# Altium PCB PCB.PcbDoc
Units mil, origin at the board's own origin, x right, y up, seen from the top; angles counter-clockwise.
Board outline 1830.01 x 1935 mil, 2 copper layers (Top Layer, Bottom Layer); 22 components, 20 nets, 93 pads, 32 vias.
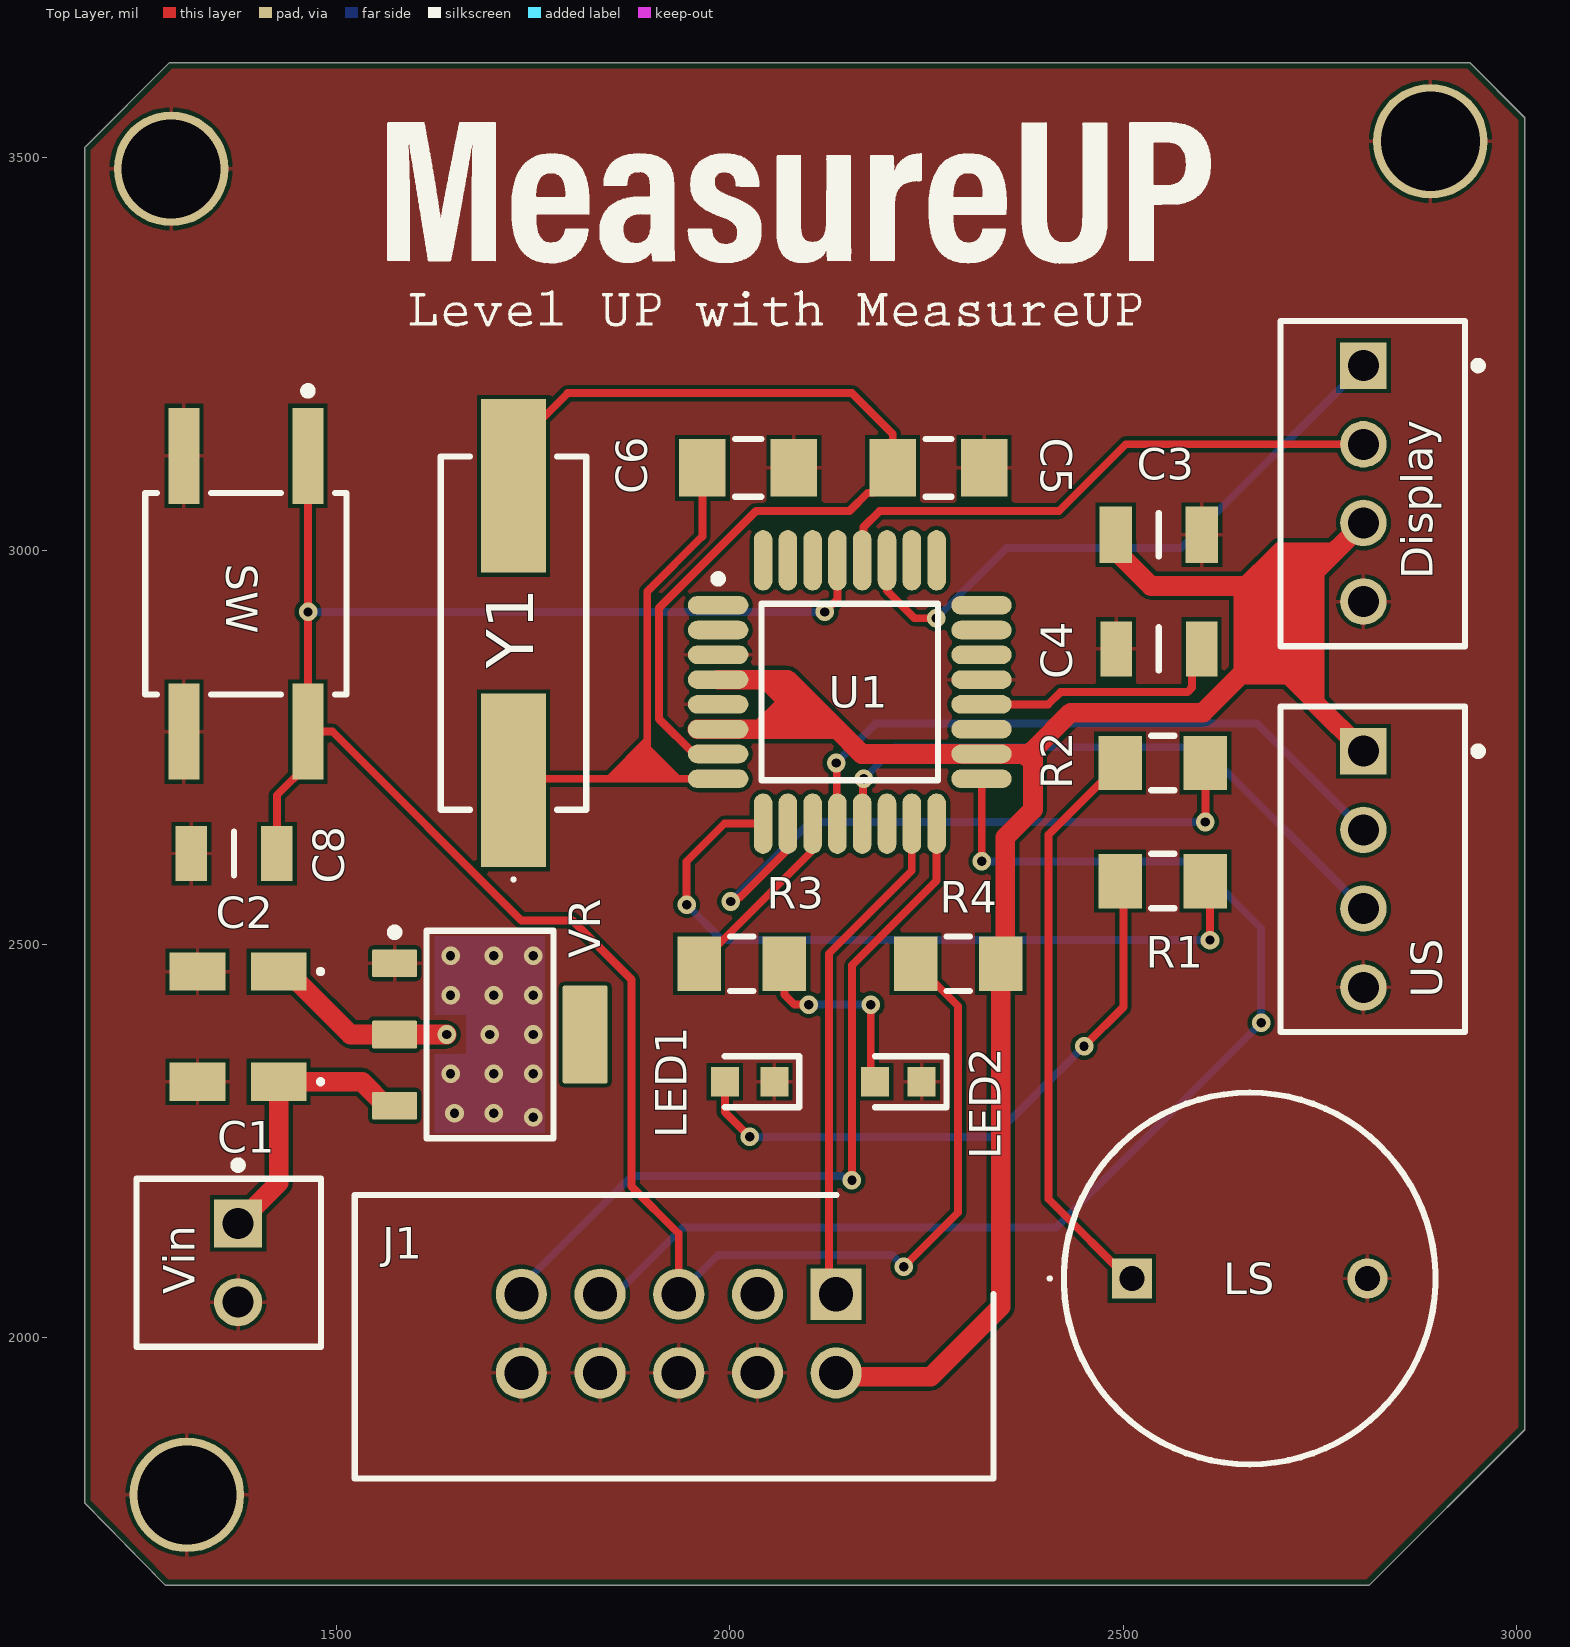
[diagram p0: Top Layer view]
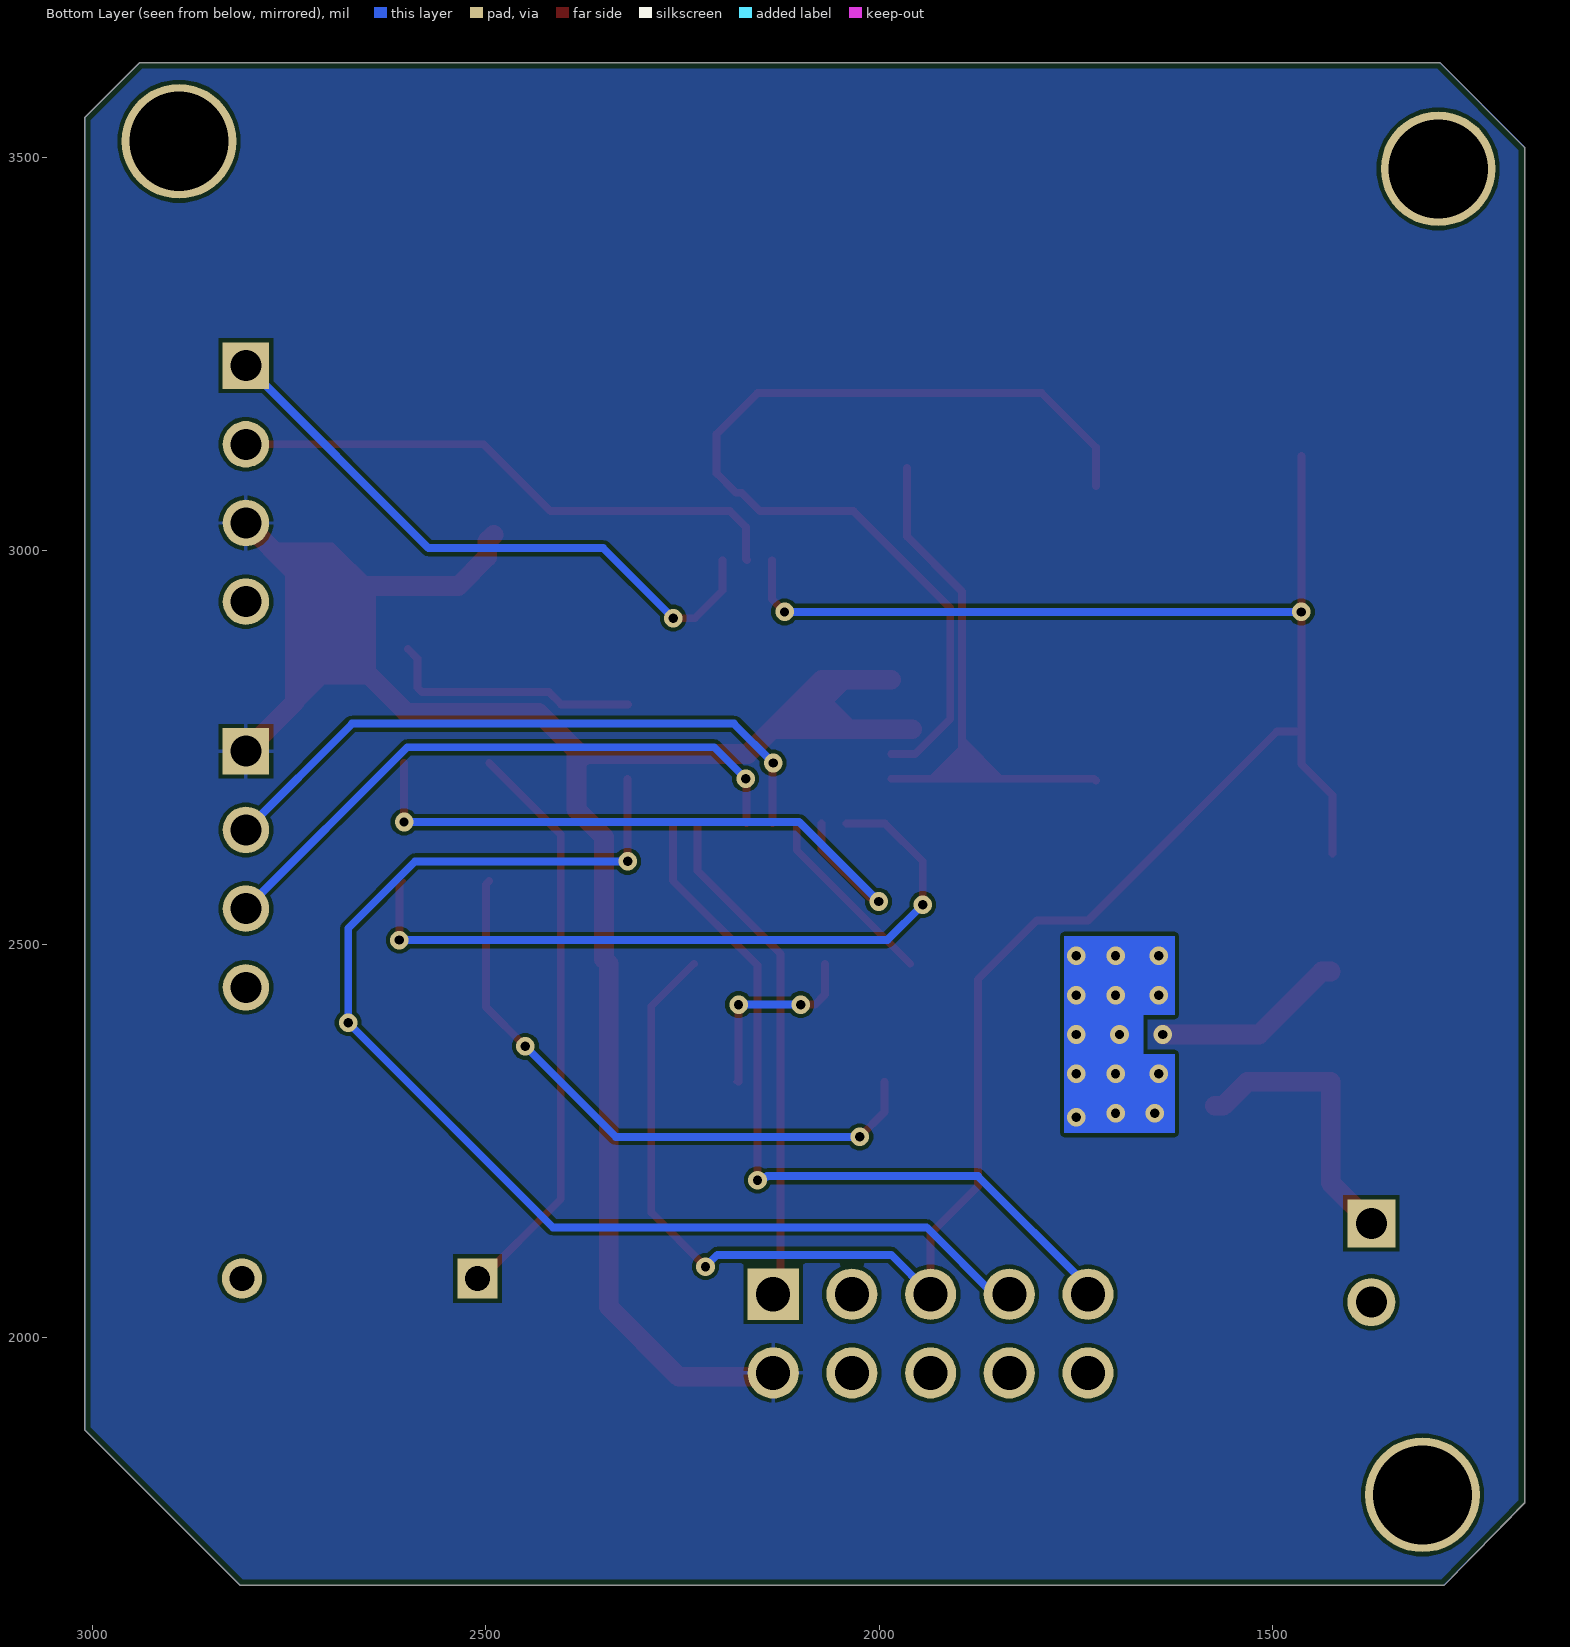
[diagram p1: Bottom Layer view, seen from below]
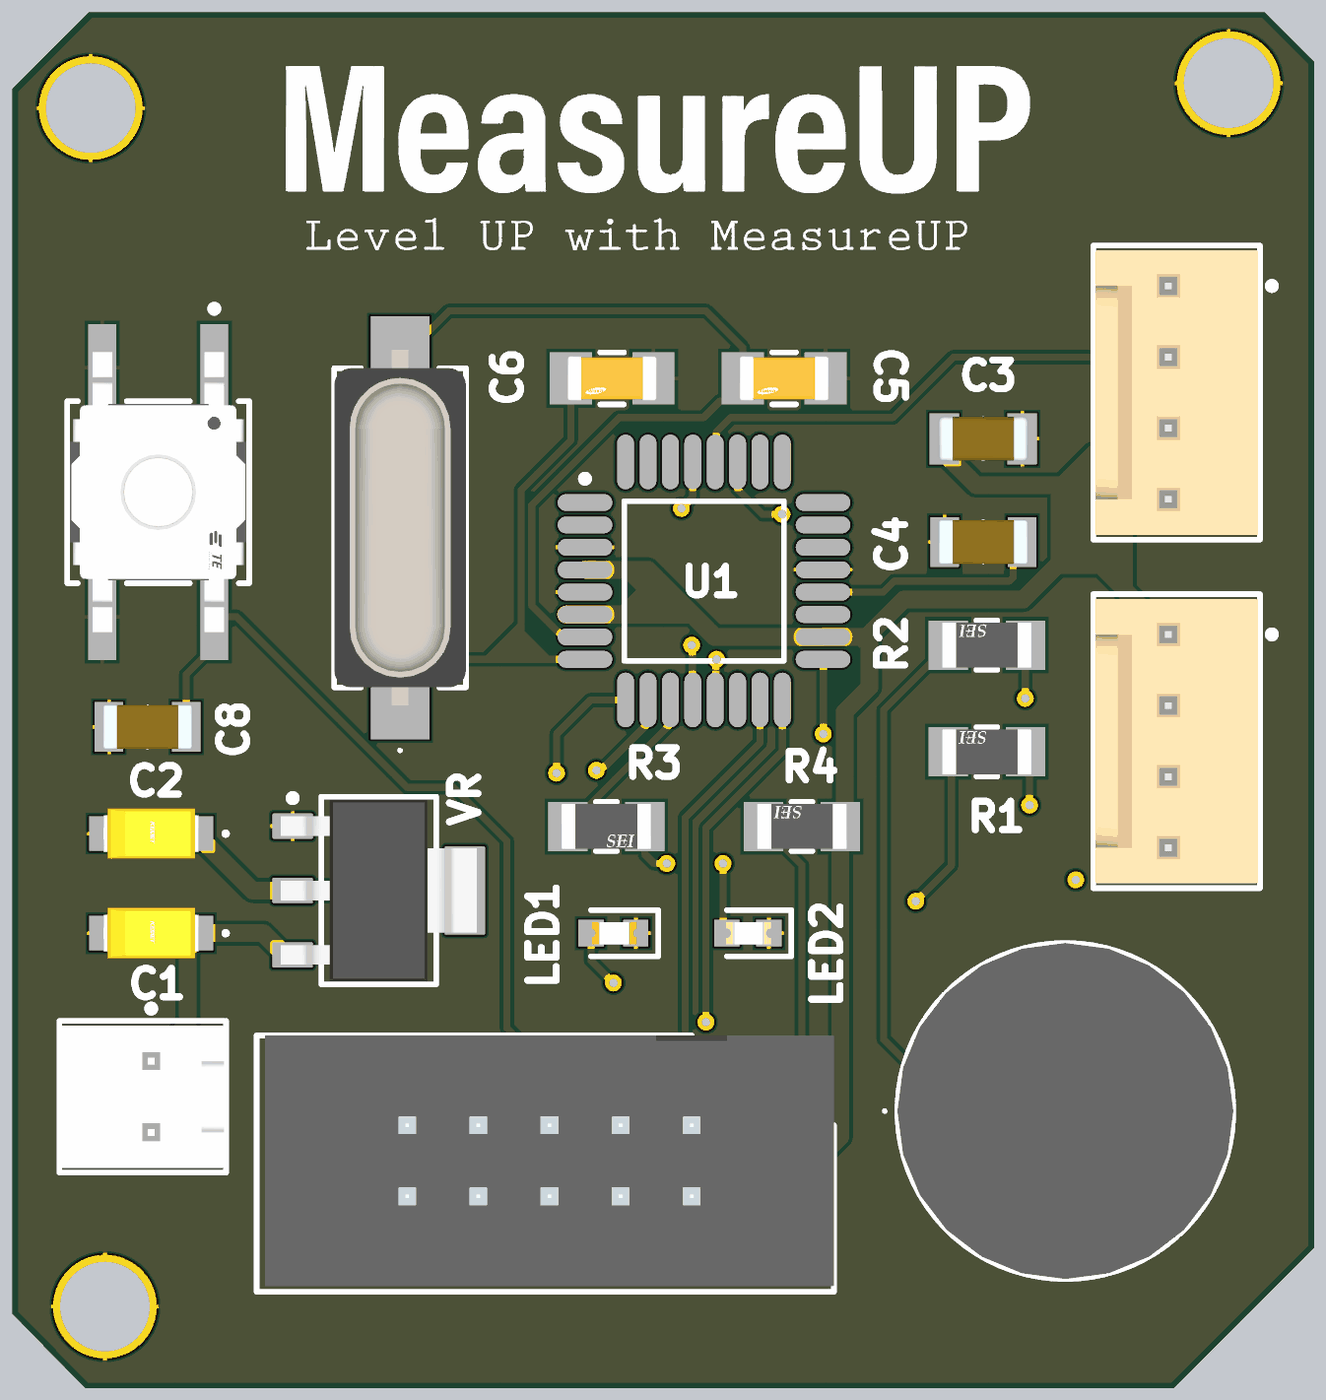
[diagram p2: 3D render of the assembled board from above, using the file's embedded part models]

## Layer stack, top to bottom
Top Solder: solder mask 0.4, Solder Resist, Dk 3.5
Top Layer: signal copper 1.4
Dielectric 1: dielectric 12.6, FR-4, Dk 4.8
Bottom Layer: signal copper 1.4
Bottom Solder: solder mask 0.4, Solder Resist, Dk 3.5

## Board outline
1282.65,1685 1179.99,1790 1179.99,3512.08 1181.45,3513.55 1287.91,3620 2940,3620 3010,3550 3010,1882.91 2812.09,1685

## Design rules (kind name [scope] priority, off if disabled: settings)
BoardOutlineClearance [All] p1: gap=7.87 ignorepadtopadclearanceinfootprint=FALSE
Clearance [All] p1: gap=5 ignorepadtopadclearanceinfootprint=FALSE except(9.84: Arc-Hole Track-Hole SMDPad-Hole THPad-Hole Via-Hole Fill-Hole Poly-Hole Region-Hole Text-Hole)
ComponentClearance [All] p1: gap=5 collisioncheckmode=3 verticalgap=5 showdistances=TRUE
DiffPairsRouting [All] p1: maxlimit=10 minlimit=5 mostfreqgap=5 toplayer_minwidth=5 toplayer_maxwidth=1000 toplayer_prefwidth=5 bottomlayer_minwidth=5 bottomlayer_maxwidth=1000 bottomlayer_prefwidth=5 maxuncoupledlength=500
Height [All] p1: minheight=0 maxheight=71497.94 prefheight=500
HoleSize [All] p1: absolutevalues=TRUE maxlimit=248.03 minlimit=11.81 maxpercent=80.000 minpercent=20.000
HoleToHoleClearance [All] p1: gap=9.84 allowstackedmicrovias=FALSE
MinimumAnnularRing [All] p1: minimumring=3
MinimumSolderMaskSliver [All] p1: minsoldermaskwidth=0
PlaneClearance [All] p1: clearance=5
PlaneConnect PlaneConnectPowerPads [InPadClass('PowerPads')] p1: planeconnectstyle=Direct reliefexpansion=20 reliefentries=4 reliefconductorwidth=10 reliefairgap=10
PlaneConnect [All] p2: pad.planeconnectstyle=Relief pad.reliefexpansion=11.81 pad.reliefentries=4 pad.reliefconductorwidth=5 pad.reliefairgap=5 via.planeconnectstyle=Direct via.reliefexpansion=11.81 via.reliefentries=4 via.reliefconductorwidth=5 via.reliefairgap=5
PolygonConnect PolygonConnectPowerPads [All vs (InPadClass('PowerPads'))] p1: connectstyle=Direct reliefconductorwidth=10 reliefentries=4 polygonreliefangle="90 Angle" airgapwidth=10
PolygonConnect [All] p2: thpad.connectstyle=Relief thpad.reliefconductorwidth=5 thpad.reliefentries=4 thpad.polygonreliefangle="90 Angle" thpad.airgapwidth=5 smdpad.connectstyle=Relief smdpad.reliefconductorwidth=5 smdpad.reliefentries=4 smdpad.polygonreliefangle="90 Angle" smdpad.airgapwidth=5 via.connectstyle=Direct via.reliefconductorwidth=5 via.reliefentries=4 via.polygonreliefangle="90 Angle" via.airgapwidth=5
RoutingVias [All] p1: holewidth=11.81 width=23.62 viastyle="Through Hole" minholewidth=11.81 minwidth=23.62 maxholewidth=23.62 maxwidth=259.84
SilkToSilkClearance [All] p1: silktosilkclearance=0
SilkToSolderMaskClearance [IsPad] p1: minsilkscreentomaskgap=5 clearancetoexposedcopper=TRUE
SolderMaskExpansion [All] p1: expansion=2.95 istentingtop=FALSE
Width [All] p1: maxlimit=1000 minlimit=5 preferedwidth=5 minimp=50.000000 maximp=50.000000 favimp=50.000000
20 further rules are at their usual default settings.

## Components (designator, comment, footprint, x,y, rotation, side; value= is the part's Value field where it differs from the comment)
C1 "T491A106K016AT" T491A 1375,2325 r180 top
C2 "T491A106K016AT" T491A 1375,2465 r180 top
C3 "CL31A106MAHNNNE" CAPC3216X180N 2545,3020 r180 top
C4 "CL31B104KBCNNNC" CAPC3216X100N 2545,2875 r0 top
C5 "CL31C220JBCNNNC" FP-CL31-IPC_A 2265,3105 r180 top
C6 "CL31C220JBCNNNC" FP-CL31-IPC_A 2023.12,3105 r180 top
C8 "CL31B104KBCNNNC" CAPC3216X100N 1370,2615 r0 top
Display "61900411121" 61900411121 2816.81,3085 r90 top
J1 "T821110A1S100CEU" SHDR10W64P254X254_2X5_2032X895X915P 2135,2055 r180 top
LED1 "LTST-C191KRKT" LEDC1608X55N 2025,2325 r180 top
LED2 "LTST-C190GKT" LEDC1608X90N 2214.06,2325 r180 top
LS "CMI-1295-0585T" CMI12950585T 2510.79,2075 r90 top
R1 "RMCF1206FT10K0" FP-RMCF1206-IPC_B 2550,2580 r180 top
R2 "RMCF1206FT10K0" FP-RMCF1206-IPC_B 2550,2730 r180 top
R3 "RMCF1206FT10K0" FP-RMCF1206-IPC_B 2015,2475 r0 top
R4 "RMCF1206FT10K0" FP-RMCF1206-IPC_B 2290,2475 r180 top
SW "1571634-2" FP-1571634-2-MFG 1385,2945 r270 top
U1 "ATmega328P-AU" 32A_M 2152.32,2820.24 r0 top
US "61900411121" 61900411121 2816.81,2595 r90 top
Vin "61900211121" FP-61900211121-MFG 1363.19,2095 r270 top
VR "LM1117MPX-5.0" DCY0004A_L 1695,2385 r0 top
Y1 "ABLS-16.000MHz-16-A-4-H-T" ABLS 1725,2895 r90 top

## Footprints (in the part's own frame and the unit in brackets; to place one, negate y for a bottom-side part, rotate by r counter-clockwise, add the part's x,y. Pads: shape width x height; smd on the part's side, far side on the other; paste and mask are expansions set on the pad)
32A_M [mm] "Thin QFP, 32-Leads, Body 7x7mm, Pitch 0.8mm, IPC Low Density"
  oval 1.95x0.6 smd: 1(-4.25,2.8) 2(-4.25,2) 3(-4.25,1.2) 4(-4.25,0.4) 5(-4.25,-0.4) 6(-4.25,-1.2) 7(-4.25,-2) 8(-4.25,-2.8) 17(4.25,-2.8) 18(4.25,-2) 19(4.25,-1.2) 20(4.25,-0.4) 21(4.25,0.4) 22(4.25,1.2) 23(4.25,2) 24(4.25,2.8)
  oval 0.6x1.95 smd: 9(-2.8,-4.25) 10(-2,-4.25) 11(-1.2,-4.25) 12(-0.4,-4.25) 13(0.4,-4.25) 14(1.2,-4.25) 15(2,-4.25) 16(2.8,-4.25) 25(2.8,4.25) 26(2,4.25) 27(1.2,4.25) 28(0.4,4.25) 29(-0.4,4.25) 30(-1.2,4.25) 31(-2,4.25) 32(-2.8,4.25)
  silkscreen extent -4.37,-2.85 2.85,3.77, body extent -3.5,-3.5 3.5,3.5, height 1.2
61900411121 [mm] "2.54mm Male Locking Header, 4p"
  rect 1.5x1.5 hole 1: 1(3.81,0.3)
  round 1.5 hole 1: 2(1.27,0.3) 3(-1.27,0.3) 4(-3.81,0.3)
  silkscreen extent -5.25,-3.52 5.25,2.97, body extent -5.08,-2.9 5.08,2.9, height 11.53
ABLS [mm]
  rect 5.6x2.1 smd: 1(-4.75,0) 2(4.75,0)
  silkscreen extent -8,-2.35 5.7,2.35, body extent -6.35,-2.35 6.35,2.35, height 4.2
CAPC3216X100N [mm]
  rect 1.02x1.78 smd: 1(-1.38,0) 2(1.38,0)
  silkscreen extent 0,-0.7 0,0.7, body extent -1.6,-0.8 1.6,0.8, height 1
CAPC3216X180N [mm]
  rect 1.05x1.82 smd: 1(-1.39,0) 2(1.39,0)
  silkscreen extent 0,-0.7 0,0.7, body extent -1.6,-0.8 1.6,0.8, height 1.8
CMI12950585T [mm]
  rect 1.3x1.3 hole 0.8: 1(0,0)
  round 1.3 hole 0.8: 2(0,-7.6)
  silkscreen extent -6,-9.8 6,2.7, body extent -6,-9.79 6,2.19, height 9.8
DCY0004A_L [mm] "SOT223, 4-Leads, Body 6.7x3.7mm, Pitch 2.3mm, IPC High Density"
  rrect11% 1.45x0.9 smd: 1(-3.075,2.3) 2(-3.075,0) 3(-3.075,-2.3)
  rrect7% 1.45x3.15 smd: 4(3.075,0)
  silkscreen extent -3.2,-3.35 2.05,3.42, body extent -3.5,-3.25 3.5,3.25, height 1.62
FP-1571634-2-MFG [mm]
  rect 3.1x1 smd paste+0 mask+0: 1(-4.45,2) 2(4.45,2) 3(-4.45,-2) 4(4.45,-2)
  silkscreen extent -6.67,-3.25 3.25,3.25, body extent -6.1,-3.35 6.1,3.35, height 0.25
FP-61900211121-MFG [mm]
  rect 1.55x1.55 hole 1 paste-1000 mask+0: 1(-1.27,0.3)
  round 1.55 hole 1 paste-1000 mask+0: 2(1.27,0.3)
  silkscreen extent -3.27,-2.97 2.71,2.98, body extent -2.81,-3.08 2.81,3.08, height 0.25
FP-CL31-IPC_A [mil]
  rect 59.27x73.16 smd paste+0 mask+0: 1(-58.12,0) 2(58.12,0)
  silkscreen extent -17,-37 17,37, body extent -107,-56 107,56, height 10
FP-RMCF1206-IPC_B [mil]
  rect 55.27x69.22 smd paste+0 mask+0: 1(-54.16,0) 2(54.16,0)
  silkscreen extent -15,-35 15,35, body extent -92,-44 92,44, height 10
LEDC1608X55N [mm]
  rect 0.9x0.95 smd: 1(-0.8,0) 2(0.8,0)
  silkscreen extent -1.6,-0.82 0.8,0.82, body extent -0.83,-0.4 0.77,0.4, height 0.55
LEDC1608X90N [mm]
  rect 0.9x0.95 smd: 1(-0.75,0) 2(0.75,0)
  silkscreen extent -1.55,-0.82 0.75,0.82, body extent -0.82,-0.4 0.78,0.4, height 0.8
SHDR10W64P254X254_2X5_2032X895X915P [mm]
  rect 1.65x1.65 hole 1.1: 1(0,0)
  round 1.65 hole 1.1: 2(0,2.54) 3(2.54,0) 4(2.54,2.54) 5(5.08,0) 6(5.08,2.54) 7(7.62,0) 8(7.62,2.54) 9(10.16,0) 10(10.16,2.54)
  silkscreen extent -5.08,-3.21 15.54,5.95, body extent -5.08,-3.2 15.24,5.74, height 9.15
T491A [mm]
  rect 1.8x1.23 smd: 1(-1.31,0) 2(1.31,0)
  silkscreen extent -2.71,-0.05 -2.61,0.05, body extent -1.7,-0.9 1.7,0.9, height 1.81

## Part data
C1 C2: "Capacitor Polarised", Manufacturer_Name=KEMET, Mouser Part Number=80-T491A106K016, Arrow Part Number=T491A106K016AT, Arrow Price/Stock=https://www.arrow.com/en/products/t491a106k016at/kemet-corporation?region=nac, Datasheet Link=https://content.kemet.com/datasheets/KEM_T2005_T491.pdf, Height=1.8mm, Manufacturer_Part_Number=T491A106K016AT, Mouser Price/Stock=https://www.mouser.co.uk/ProductDetail/KEMET/T491A106K016AT?qs=hg06hKRDeG1uMktjT%252BG2VQ%3D%3D
C3: "Capacitor", Manufacturer_Name=SAMSUNG, Mouser Part Number=187-CL31A106MAHNNNE, Arrow Part Number=CL31A106MAHNNNE, Arrow Price/Stock=https://www.arrow.com/en/products/cl31a106mahnnne/samsung-electro-mechanics?region=nac, Datasheet Link=https://www.arrow.com/en/products/cl31a106mahnnne/samsung-electro-mechanics, Height=1.8mm, Manufacturer_Part_Number=CL31A106MAHNNNE, Mouser Price/Stock=https://www.mouser.co.uk/ProductDetail/Samsung-Electro-Mechanics/CL31A106MAHNNNE?qs=9y2YoPkPyvYkOWbcUKSn%252BQ%3D%3D
C4 C8: "Capacitor", Manufacturer_Name=SAMSUNG, Mouser Part Number=187-CL31B104KBCNNNC, Arrow Part Number=CL31B104KBCNNNC, Arrow Price/Stock=https://www.arrow.com/en/products/cl31b104kbcnnnc/samsung-electro-mechanics?region=nac, Datasheet Link=https://datasheet.datasheetarchive.com/originals/distributors/Datasheets_SAMA/0fdb6a11e020a7299f4d0713dd2bd7ee.pdf, Height=1mm, Manufacturer_Part_Number=CL31B104KBCNNNC, Mouser Price/Stock=https://www.mouser.co.uk/ProductDetail/Samsung-Electro-Mechanics/CL31B104KBCNNNC?qs=349EhDEZ59oHABbyGq1iKA%3D%3D
C5 C6: library part CMP-13271-001055-1, "Cap Ceramic 22pF 50V C0G ±5% SMD 1206 +125°C Embossed T/R", Capacitance=22pF, Case Code (Imperial)=1206, Case Code (Metric)=3216, Dielectric=C0G, Max Operating Temperature=125°C, Min Operating Temperature=-55°C, Package Quantity=1, Temperature Coefficient=300ppm/°C, Tolerance=5%, Voltage=50V, Case/Package=1206, Depth=1.6mm, Height=0.85mm, Lead Free="Lead Free", Length=3.2mm, Material=Ceramic, Mount="Surface Mount", Packaging="Tape and Reel", Radiation Hardening=No, Thickness=0.039inch, Voltage Rating=50V, Voltage Rating (DC)=50V, Width=0.063inch
Display US: library part CMP-1502-00586-1, "Male Locking Header WR-WTB, THT, Vertical, pitch 2.54 mm, 1 x 4 position", Contact Resistance=20mOhm, Manufacturer="Wurth Elektronik", Operating Temperature=-40to105degC, Working Voltage=250VAC, Datasheet URL=https://katalog.we-online.de/em/datasheet/6190xx11121.pdf, Gender=Male, Manufacturer URL=http://www.we-online.de, Mounting Technology=THT, Orientation=Vertical, Package Reference=61900411121, Packaging=Bag, Part Number=61900411121, Pitch=2.54mm, Position=1x4, Publisher=WurthElektronik
J1: "Connector", Manufacturer_Name=Amphenol, Mouser Part Number=N/A, Arrow Part Number=T821110A1S100CEU, Arrow Price/Stock=https://www.arrow.com/en/products/t821110a1s100ceu/amphenol-fci?region=europe, Datasheet Link=https://docs.rs-online.com/e09c/0900766b81359cba.pdf, Height=9.15mm, Manufacturer_Part_Number=T821110A1S100CEU, Mouser Price/Stock=https://www.mouser.co.uk/ProductDetail/Amphenol/T821110A1S100CEU?qs=3IN%252Br8p6BrNf%2FuKCWm44Bg%3D%3D
LED1: "LED", Manufacturer_Name=Lite-On, Mouser Part Number=859-LTST-C191KRKT, Arrow Part Number=LTST-C191KRKT, Arrow Price/Stock=https://www.arrow.com/en/products/ltst-c191krkt/lite-on-technology?region=nac, Datasheet Link=http://www.mouser.com/ds/2/239/S_110_LTST-C191KRKT-539838.pdf, Height=0.55mm, Manufacturer_Part_Number=LTST-C191KRKT, Mouser Price/Stock=https://www.mouser.co.uk/ProductDetail/Lite-On/LTST-C191KRKT?qs=BAIUz4Y8PJBLfOhzue0q%252BA%3D%3D
LED2: "LED", Manufacturer_Name=Lite-On, Mouser Part Number=859-LTST-C190GKT, Arrow Part Number=LTST-C190GKT, Arrow Price/Stock=https://www.arrow.com/en/products/ltst-c190gkt/lite-on-technology?region=nac, Datasheet Link=https://media.digikey.com/pdf/Data%20Sheets/Lite-On%20PDFs/LTST-C190GKT.pdf, Height=0.9mm, Manufacturer_Part_Number=LTST-C190GKT, Mouser Price/Stock=https://www.mouser.co.uk/ProductDetail/Lite-On/LTST-C190GKT?qs=drxkyCeiWgbQzclgbojDOg%3D%3D
LS: "Loudspeaker or Buzzer", Manufacturer_Name="CUI Devices", Mouser Part Number=490-CMI-1295-0585T, Arrow Part Number=CMI-1295-0585T, Arrow Price/Stock=https://www.arrow.com/en/products/cmi-1295-0585t/cui-devices?region=nac, Datasheet Link=https://www.cuidevices.com/product/resource/pdf/cmi-1295-0585t.pdf, Height=9.7mm, Manufacturer_Part_Number=CMI-1295-0585T, Mouser Price/Stock=https://www.mouser.co.uk/ProductDetail/CUI-Devices/CMI-1295-0585T?qs=P1JMDcb91o6b8IYPugSq6A%3D%3D
R1 R2 R3 R4: library part CMP-26527-000151-1, "10kΩ ±1% 0.25W 1206 Thick Film Chip Resistor AEC-Q200 compliant RMCF1206FT10K0", Case Code (Imperial)=1206, Case Code (Metric)=3216, Max Operating Temperature=155°C, Max Power Dissipation=250mW, Min Operating Temperature=-55°C, Resistance=10kR, Resistor Type="Thick Film", Temperature Coefficient=100ppm/°C, Tolerance=1%, Case/Package=1206, Construction=Rectangular, Contact Plating=Tin, Depth=1.6mm, Features="Automotive AEC-Q200", Height=0.028inch, Lead Free="Lead Free", Length=3.2mm, Military Standard=Not, Mount="Surface Mount", Number of Terminations=2, Packaging="Tape and Reel", Power Rating=250mW, Radiation Hardening=No, RoHS Compliant=Yes, Series=RMCF, Size Code=1206, Width=0.063inch
SW: library part CMP-03407-000008-1, "SWITCH TACTILE SPST-NO 0.05A 24V", Actuator Color=Natural, Case/Package=SMD/SMT, Contact Current Rating=50mA, Max Operating Temperature=85°C, Max Voltage Rating (DC)=12V, Min Operating Temperature=-40°C, Operating Force=160gf, Package Quantity=1000, Actuator Length=0.094inch, Actuator Material=Rubber, Actuator Type=Standard, Contact Material="Stainless Steel", Contact Plating=Silver, Current Rating=50mA, Depth=10mm, ELV=Compliant, Illumination Type=Illuminated, Lead Free="Lead Free", Length=6.2mm, Max Current Rating=50mA, Mechanical Life=5000000Cycles, Mount="Surface Mount", Orientation=Straight, Packaging="Tape and Reel", Radiation Hardening=No, RoHS Compliant=Yes, Switch Function=Off-Mom, Termination="Gull Wing", Throw Configuration=SPST, Type=Switch, Voltage Rating (DC)=12V
U1: library part CMP-0095-00269-2, "8-bit AVR Microcontroller, 32KB Flash, 1KB EEPROM, 2KB SRAM, 32-pin TQFP, Industrial Grade (-40°C to 85°C)", Code_JEDEC=MS-026-ABA, ComponentLink1Description="Manufacturer URL", ComponentLink1URL=http://www.atmel.com/, ComponentLink2Description="ATmega48A/48PA/88A/88PA/168A/168PA/328/328P Datasheet", ComponentLink2URL=http://www.atmel.com/dyn/resources/prod_documents/doc8271.pdf, ComponentLink3Description="ATmega48A/48PA/88A/88PA/168A/168PA/328/328P Summary", ComponentLink3URL=http://www.atmel.com/dyn/resources/prod_documents/8271S.pdf, DatasheetVersion="revD, May-2011", PackageDescription="32-Lead, 7x7x1.0 mm Body, 0.8mm Lead Pitch, Thin Profile Plastic Quad Flat Package (TQFP)", PackageReference=32A, PackageVersion="revC, Oct-2010", RevisionNote="DatasheetVersion & PackageVersion updated. URLs added."
Vin: library part CMP-1502-00584-2, "CONN HEADER VERT 2POS 2.54MM", Color=Beige, Current Rating=3A, Flammability Rating="UL94 V-0", Insulation Resistance=1GR, Max Operating Temperature=105°C, Min Operating Temperature=-40°C, Package Quantity=1000, Voltage Rating=250V, Connector Type=Header, Contact Finish - Mating=TIN, Contact Gender=Male, Contact Material="Copper Alloy", Contact Mating Length=0.295inch, Contact Plating=Tin, Contact Shape=Square, Contact Type="Male Pin", Fastening Type=Friction, Gender=Male, Height=14.2mm, Housing Material=Nylon, Insulation Color=Beige, Insulation Material=Nylon, Length=5.8mm, Mount="Through Hole", Number of Contacts=2, Number of Positions=2, Number of Rows=1, Packaging=Bulk, Pitch=2.54mm, RoHS Compliant=Yes, Series=WR-WTB, Termination="Through Hole", Width=5.12mm
VR: library part CMP-0062-01637-4, "800mA Low-Dropout Linear Regulator, 4-pin SOT-223", Manufacturer="Texas Instruments", PackageTopMarking=XYTT*N06A, PowerWise=N, Code_IPC=SOT223-4, Code_JEDEC=TO-261-AA, ComponentLink1Description="Datasheet URL", ComponentLink1URL=http://www.ti.com/general/docs/lit/getliterature.tsp?genericPartNumber=LM1117-N&fileType=pdf, CompType="LDO IC", High-Reliability=Y, PackageDescription="Molded SOT-223, 6.50 x 3.56 x 1.6mm Body, 4 Lead, 2.3mm Pitch", PackageReference=DCY0004A, PartNumber=LM1117MPX-5.0, PinCount=4, RoHS=N
Y1: "Crystal or Oscillator", Arrow Part Number=ABLS-16.000MHZ-16-A-4-H-T, Manufacturer_Name=ABRACON, Mouser Part Number=815-LS16000MHZ16A4HT, Arrow Price/Stock=https://www.arrow.com/en/products/abls-16.000mhz-16-a-4-h-t/abracon, Datasheet Link=https://abracon.com/Resonators/abls.pdf, Manufacturer_Part_Number=ABLS-16.000MHz-16-A-4-H-T, Mouser Price/Stock=https://www.mouser.co.uk/ProductDetail/ABRACON/ABLS-16.000MHZ-16-A-4-H-T?qs=vLWxofP3U2z6hhU1at4Vrw%3D%3D

## Free pads (board coordinates)
  round 145.67 hole 125.98: 7(1290,3485) 8(2890,3520) 10(1310,1800)

## Via types
v1: diameter 23.62, hole 11.81, Top Layer to Bottom Layer, 17 vias
v2: diameter 23.62, hole 11.81, Top Layer to Bottom Layer, tented both sides, 15 vias

## Nets (pads, with @x,y where several pads share a name; then routed paths per layer and width w, separated by ;. In a path a pad name is that pad's centre, name@x,y a point inside that pad or via, vN(x,y) a via of type N, cw(c..) or ccw(c..) an arc to the next point about the centre after c; other vN are vias at no path point)
9V: C1.1 Vin.1 VR.3 | length 361.4
  Top Layer w25: Vin.1 1426.57,2196.57 C1.1 1532.56,2325 1563.11,2294.45 VR.3
+5V: C2.1 C3.2 Display.3 J1.2 R4.1 U1.4 U1.6 U1.18 US.1 VR.2 | length 2882.1
  Top Layer w25: C2.1 1437.8,2465 1517.8,2385 v2(1640,2385) ; U1.6@1958.43,2772.99 U1.6 2136,2772.99 ; U1.4 2073.01,2835.98 2136,2772.99 ; J1.2@2150,1950 2255,1950 2344.16,2039.16 R4.1 2350,2480.84 2350,2635.84 2385,2670.84 2385,2741.5 2385,2746 2433,2794 2601,2794 2743,2936 ; 2377.85,2737.17 2372.5,2741.5 2167.5,2741.5 2136,2772.99 ; C3.2 2498.45,3011.83 2498.45,2991.55 2535,2955 2743,2955 ; US.1 2743,2807 2743,2936 ; Display.3 2743,2973 2743,2955 ; 2743,2936 2743,2955
D5: R1.1 U1.9 | length 933
  Top Layer w5: R1.1 R1.1@2610,2574.16
  Top Layer w10: v1(1945,2550) 1945,2605 1992.91,2652.91 U1.9 ; v1(2610,2505) R1.1@2610,2574.16
  Bottom Layer w10: v1(1945,2550) 1990,2505 v1(2610,2505)
D6: R2.1 U1.10 | length 852.7
  Top Layer w5: v1(2604,2655) v1@2604.16,2655.16
  Top Layer w10: v1(2001,2554) 2006.04,2554 2011.4,2559.36 2012.95,2559.36 2073.58,2620 U1.10 ; v1@2604.16,2655.16 R2.1
  Bottom Layer w10: v1(2001,2554) 2102,2655 v1(2604,2655)
D7: R3.1 U1.11 | length 237.7
  Top Layer w10: R3.1 2105.08,2619.24 U1.11
ECHO: U1.13 US.3 | length 794.4
  Top Layer w5: U1.13 U1.13@2169.03,2653.88 ; v1@2169.03,2709.03 v1(2170,2710)
  Top Layer w10: U1.13@2169.03,2653.88 v1@2169.03,2709.03
  Bottom Layer w10: v1(2170,2710) 2210,2750 2600,2750 US.3
GND: C1.2 C2.2 C3.1 C4.1 C5.1 C6.1 C8.1 Display.4 J1.4 J1.6 J1.8 J1.10 LED1.1 LED2.1 LS.2 pad.7 pad.8 pad.10 SW.3 SW.4 U1.3 U1.5 U1.21 US.4 Vin.2 VR.1
  other v2: 1750,2280 1650,2285 1700,2285 1645,2335 1700,2335 1750,2335 1695,2385 1750,2385 1645,2435 1700,2435 1750,2435 1645,2485 1700,2485 1750,2485
MISO: J1.9 U1.16 | length 987.5
  Top Layer w10: v1(2155,2200) 2155,2473 2262.56,2580.56 U1.16
  Bottom Layer w10: J1.9 1735,2065 1875,2205 2142.76,2205 2144.2,2203.56 2151.44,2203.56 v1(2155,2200)
MOSI: J1.1 U1.15 | length 656.6
  Top Layer w10: J1.1@2150,2050 2125.69,2074.31 2125.69,2487.69 2231.06,2593.06 U1.15
NetC4_2: C4.2 U1.20 | length 330.5
  Top Layer w10: U1.20 2404.49,2804.49 2420,2820 2581.28,2820 2587.14,2825.86 2587.14,2862.81 C4.2
NetC5_2: C5.2 U1.7 Y1.2 | length 1233.3
  Top Layer w10: Y1.2 1725,3131.16 1793.84,3200 2155,3200 2206.88,3148.12 2206.88,3098.06 2182.24,3073.42 2175.3,3073.42 2152.01,3050.13 2033.13,3050.13 1910,2927 1910,2786 1954.5,2741.5 U1.7
NetC6_2: C6.2 U1.8 Y1.1 | length 684.8
  Top Layer w10: Y1.1 1727.01,2710 1895,2710 ; C6.2 1965,3018 1895,2948 1895,2710 ; U1.8 1895,2710
NetLED1_2: LED1.2 R1.2 | length 788.1
  Top Layer w10: LED1.2 1993.5,2286.5 v1(2025,2255) ; v1(2450,2370) 2500,2420 2500,2575.84 R1.2
  Bottom Layer w10: v1(2025,2255) 2335,2255 v1(2450,2370)
NetLED2_2: LED2.2 R3.2 | length 256.8
  Top Layer w5: LED2.2@2179,2325 LED2.2@2183.5,2325
  Top Layer w10: R3.2 2069.18,2435.82 2082,2423 v1(2100,2423) ; LED2.2@2179,2325 v1(2179,2423)
  Bottom Layer w10: v1(2100,2423) v1(2179,2423)
NetLS_1: LS.1 R2.2 | length 741.4
  Top Layer w10: R2.2 2405,2639.16 2405,2175.79 LS.1@2510.79,2070
RESET: C8.2 J1.5 R4.2 SW.1 SW.2 U1.29 | length 2966.1
  Top Layer w10: C8.2 1424.33,2689.06 1463.74,2728.47 SW.2 ; SW.1 v1@1463.74,2922.26 ; v1(1464,2922) v1@1463.74,2922.26 ; J1.5 1935,2132 1875,2192 1875,2455 1800,2530 1735,2530 1495.2,2769.8 SW.2 ; v1(2120.57,2922) 2136.57,2938 U1.29 ; v1(2221,2090) 2290,2159 2290,2420.84 R4.2 ; SW.2 v1@1463.74,2922.26
  Bottom Layer w10: v1(1464,2922) v1(2120.57,2922) ; J1.5 1985,2105 2206,2105 v1(2221,2090)
SCK: J1.7 U1.17 | length 1585.3
  Top Layer w5: U1.17 U1.17@2320,2709.64
  Top Layer w10: v1(2320,2605) U1.17@2320,2709.64
  Bottom Layer w10: J1.7@1850,2050 1940,2140 2415,2140 v1(2675,2400) 2675,2520 2590,2605 v1(2320,2605)
SCL: Display.2 U1.28 | length 721.7
  Top Layer w10: U1.28 2169.76,2989.24 2169.76,3029.76 2190,3050 2418,3050 2503,3135 Display.2
SDA: Display.1 U1.27 | length 791.5
  Top Layer w10: U1.27 2199.57,2949 2234.57,2914 v1(2262,2914)
  Bottom Layer w10: v1(2262,2914) 2351,3003 2573,3003 Display.1
TRIG: U1.12 US.2 | length 824.4
  Top Layer w5: v1(2135,2730) v1@2135.79,2729.21 ; U1.12@2135.79,2653.7 U1.12
  Top Layer w10: U1.12@2135.79,2653.7 v1@2135.79,2729.21
  Bottom Layer w10: v1(2135,2730) 2185,2780 2670,2780 US.2
pads on no net: J1.3 U1.1 U1.2 U1.14 U1.19 U1.22 U1.23 U1.24 U1.25 U1.26 U1.30 U1.31 U1.32 VR.4

## Polygon pours and split planes (outlines as drawn)
+5V on Bottom Layer "+5V_L02_P004" (solid, pour order 4): 1282.65,1685 1179.99,1790 1179.99,3512.08 1181.45,3513.55 1287.91,3620 2940,3620 3010,3550 3010,1882.91 2812.09,1685
no net on Bottom Layer "NONET_L02_P003" (solid, pour order 3): 1282.65,1685 1179.99,1790 1179.99,3512.08 1181.45,3513.55 1287.91,3620 2940,3620 3010,3550 3010,1882.91 2812.09,1685
GND on Top Layer "GND_L01_P002" (solid, pour order 2): 1282.65,1685 1179.99,1790 1179.99,3512.08 1181.45,3513.55 1287.91,3620 2940,3620 3010,3550 3010,1882.91 2812.09,1685

## Other copper
Top Layer:
  region net NetC6_2: 1840,2710 1895,2765 1895,2755 1940,2710
  region net +5V: 2639,2955 2640,2954 2640,2830 2705,2830 2743,2792 2743,2963 2790,3010 2694,3010
  region net +5V: 2057,2807.99 2035,2786 2035,2770 2085,2770 2095,2780
  region net +5V: 2029,2835.98 2084.99,2780 2130,2780 2080,2830
Bottom Layer:
  region net GND: 1625,2510 1765,2510 1765,2260 1625,2260 1625,2360 1665,2360 1665,2410 1625,2410

## Silkscreen, mask and mechanical layers (free items; w line width, h text height)
Top Overlay:
  drawing of 30 lines, arcs and shapes, not listed
Mechanical 13:
  lines w15: 1179.99,1790 1179.99,3512.08 1181.45,3513.55 1287.91,3620 2727.91,3620 2940,3620 3010,3550 3010,1882.91 2812.09,1685 1282.65,1685 1179.99,1790